# Altium PCB PDC.PcbDoc (part 3 of 3)
Units mil, origin at the board's own origin, x right, y up, seen from the top; angles counter-clockwise.
Board outline 5200.04 x 5000 mil, 4 copper layers (Top Layer, Signal Layer 1, Signal Layer 2, Bottom Layer), stack 30.634 mil thick; 172 components, 174 nets, 838 pads, 390 vias.
Unrouted connection lines stored in the file: 157.
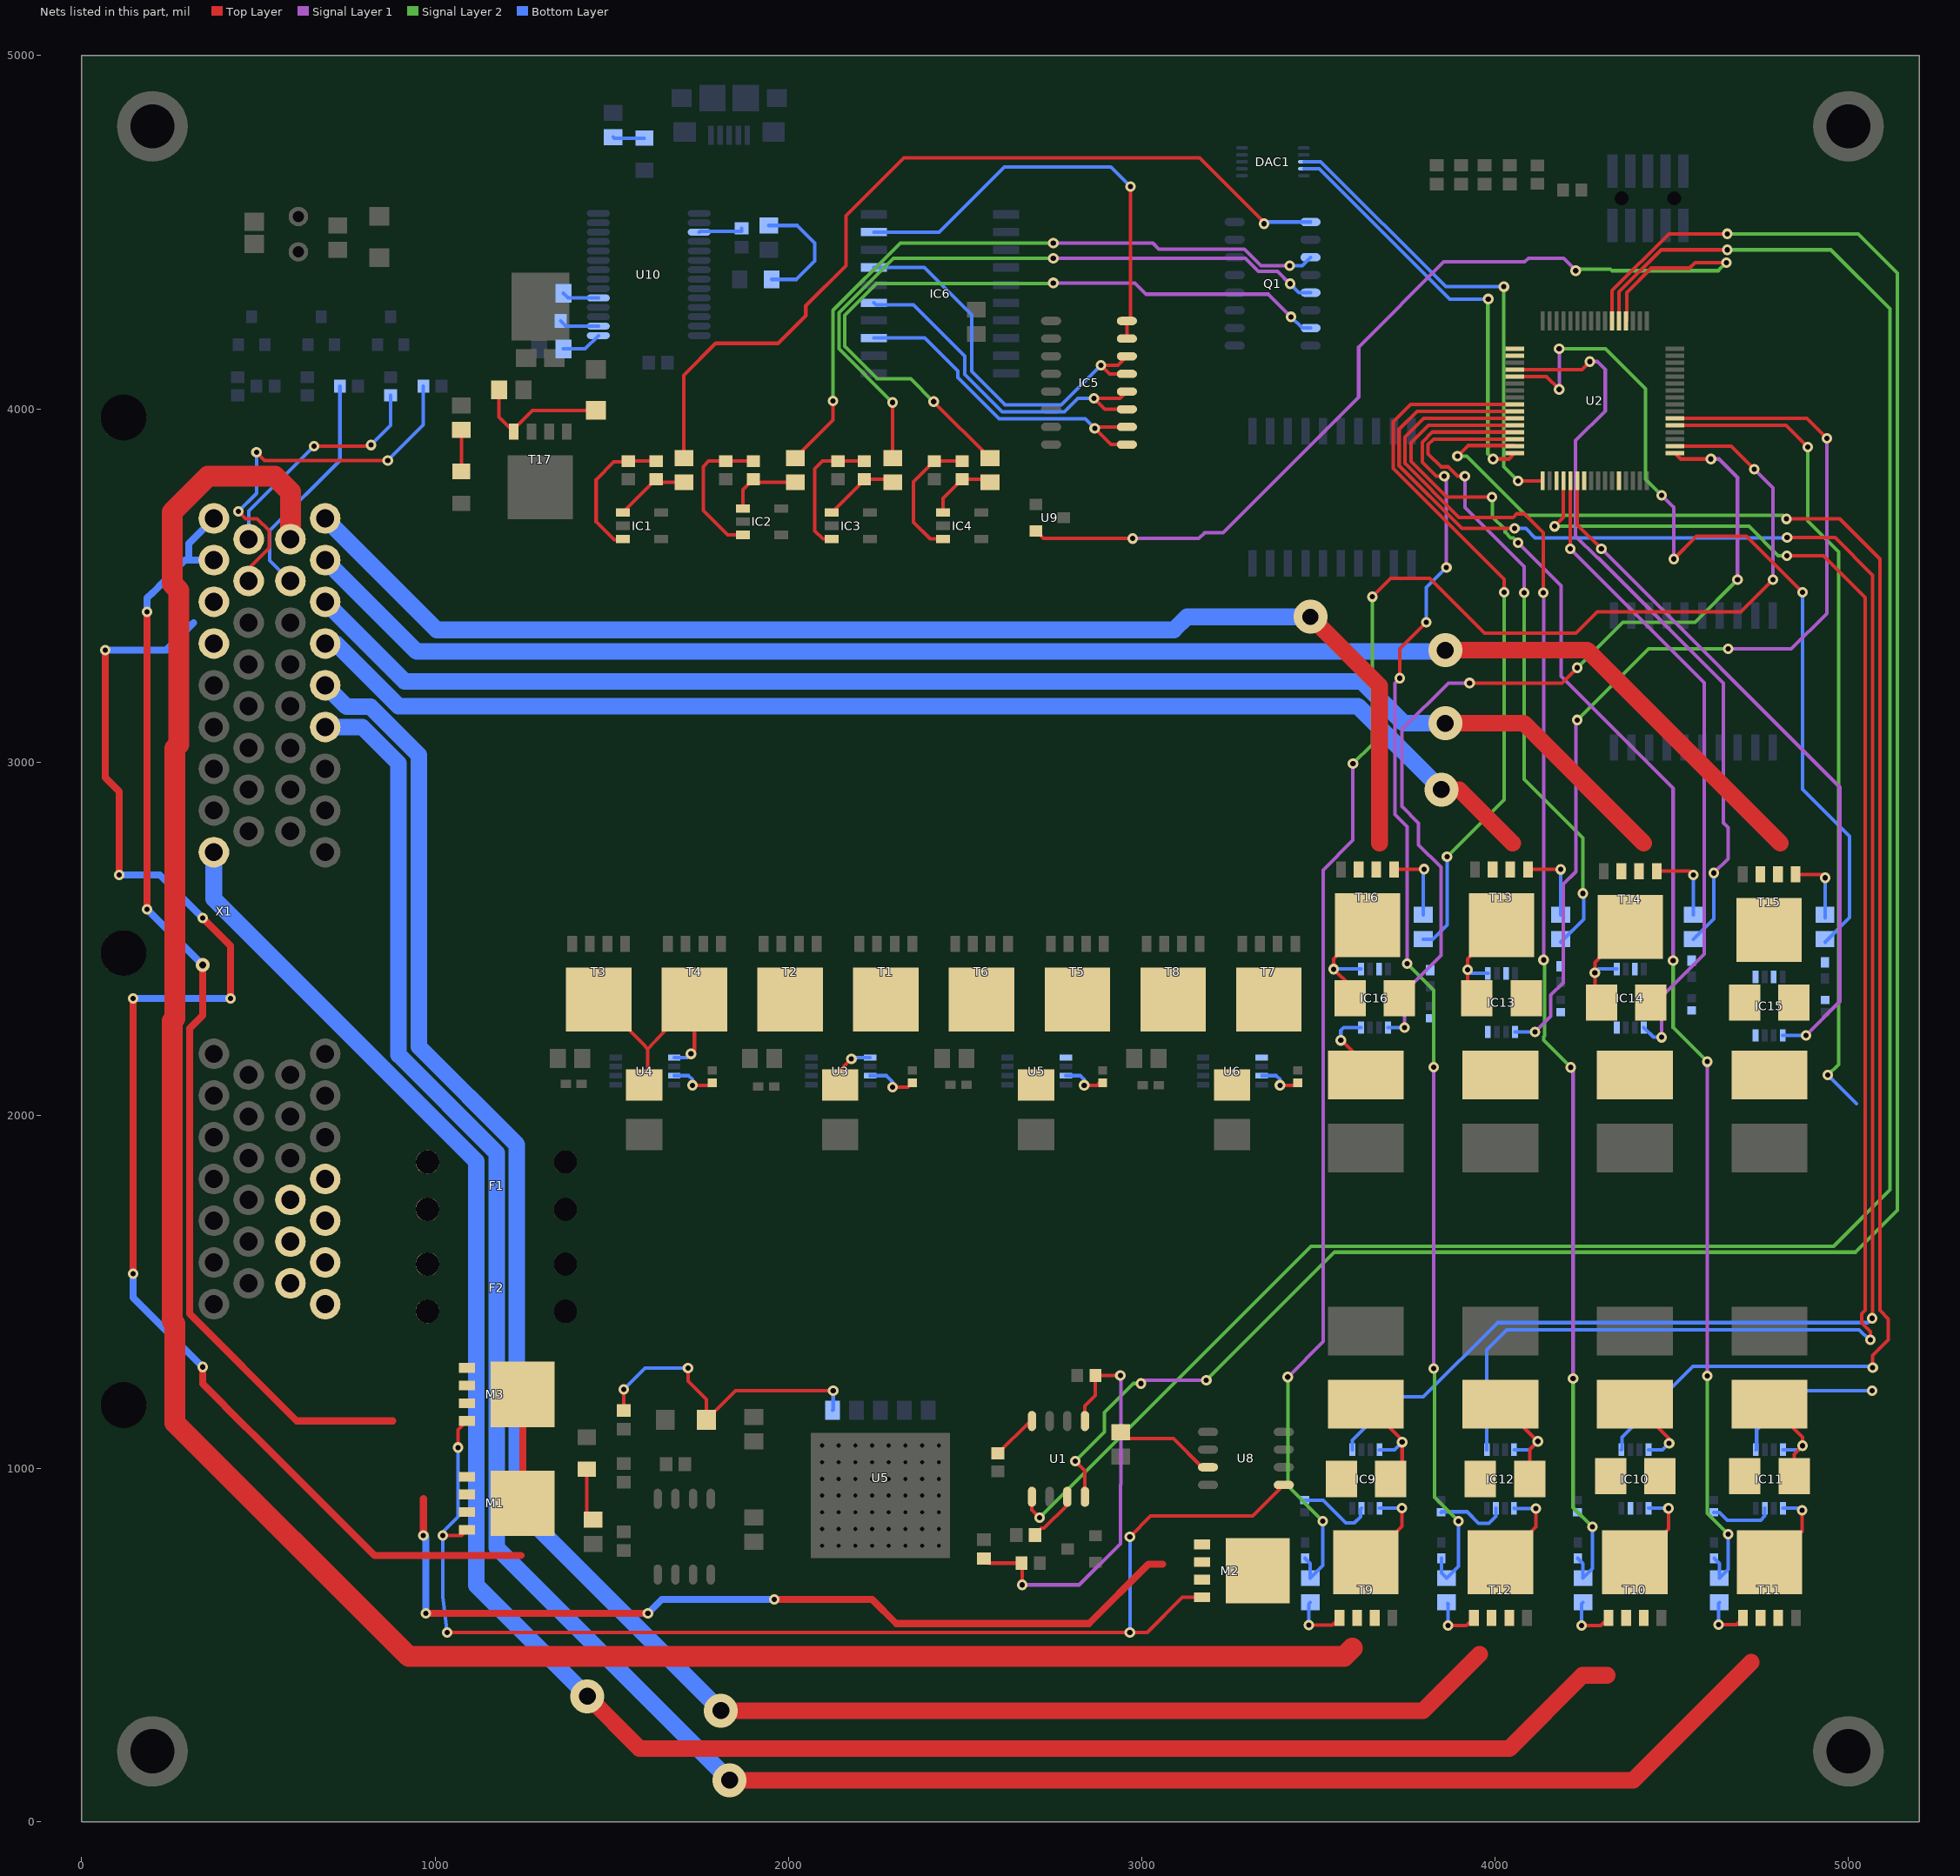
[diagram p5: the nets of this part, all layers, seen from the top]

## Via types
v1: diameter 30, hole 15, Top Layer to Bottom Layer, 376 vias
v2: diameter 96, hole 48, Top Layer to Bottom Layer, 6 vias
v3: diameter 20, hole 10, Top Layer to Bottom Layer, 3 vias
v4: diameter 100, hole 50, Top Layer to Bottom Layer, 2 vias
v5: diameter 96, hole 46, Top Layer to Bottom Layer, 1 vias
v6: diameter 35, hole 20, Top Layer to Bottom Layer, 1 vias
v7: diameter 40, hole 20, Top Layer to Bottom Layer, 1 vias

## Nets (pads, with @x,y where several pads share a name; then routed paths per layer and width w, separated by ;. In a path a pad name is that pad's centre, name@x,y a point inside that pad or via, vN(x,y) a via of type N, cw(c..) or ccw(c..) an arc to the next point about the centre after c; other vN are vias at no path point) (continued)
LC_1_ISENSE_ADC: IC16.5 U2.49 | length 2600.6
  Top Layer w10: v1(3927.57,3223.95) 4189.46,3223.95 v1(4232.68,3267.17) ; U2.49@4508.27,3874.97 4525.16,3858.08 v1(4610.61,3858.08)
  Signal Layer 1 w10: v1(3743.9,2248.51) 3743.9,2349.76 3847.03,2452.89 3847.03,2702.54 3783.45,2766.13 3783.45,2827.62 3736.49,2874.59 3736.49,3092.92 3867.51,3223.95 v1(3927.57,3223.95) ; v1(4610.61,3858.08) 4633.92,3858.08 4685.93,3806.07 v1(4685.93,3516.24)
  Signal Layer 2 w10: v1(4232.68,3267.17) 4361.58,3396.06 4565.76,3396.06 v1(4685.93,3516.24)
  Bottom Layer w10: IC16.5@3697.03,2248.51 v1(3743.9,2248.51)
LC_1_OUTPUT: R59.2 T16.1 T16.2 T16.3 X1.A1 | length 3872.4
  Top Layer w10: T16.1@3713.96,2696.16 3714.92,2697.11 v1(3799.01,2697.11)
  Top Layer w47.24: v5(3477.48,3411.42) 3672.82,3216.07 3672.82,2770.63
  Bottom Layer w10: R59.2@3796.44,2567.62 3796.44,2694.55 v1(3799.01,2697.11)
  Bottom Layer w47.24: X1.A1@688.98,3690.01 1004.81,3374.17 3090.86,3374.17 3128.11,3411.42 v5(3477.48,3411.42)
LC_1_VSENSE_ADC: R59.1 R60.2 U2.25 | length 2069.8
  Top Layer w10: v1(4025.67,3480.83) 4025.67,3518.21 3711.73,3832.15 3711.73,3963.53 3760.97,4012.77 U2.25@4055.51,4012.77
  Signal Layer 2 w10: v1(3863.78,2732.15) 4025.67,2894.04 v1(4025.67,3480.83)
  Bottom Layer w10: R59.1@3796.44,2498.72 3823.42,2498.72 3863.78,2539.08 v1(3863.78,2732.15)
LC_2_ISENSE_ADC: IC15.5 U2.38 | length 1982.5
  Top Layer w10: U2.38@4232.68,3796.23 4232.68,3672.12 v1(4300.71,3604.09)
  Signal Layer 1 w10: v1(4300.71,3604.09) 4975.2,2929.6 4975.2,2322.14 v1(4879.51,2226.46)
  Bottom Layer w10: IC15.5@4813.96,2226.46 v1(4879.51,2226.46)
LC_2_OUTPUT: R56.2 T15.1 T15.2 T15.3 X1.A2 | length 4653.5
  Top Layer w10: T15.1@4850.58,2682.38 4923.81,2682.38 v1(4933.65,2672.54)
  Top Layer w47.24: v2(3858.8,3316.93) 4260.78,3316.93 4807.07,2770.63
  Bottom Layer w10: R56.2@4933.65,2559.35 v1(4933.65,2672.54)
  Bottom Layer w47.24: X1.A2@688.98,3571.9 947.77,3313.11 3854.98,3313.11 v2(3858.8,3316.93)
LC_2_VSENSE_ADC: R56.1 R57.2 U2.21 | length 2593.7
  Top Layer w10: U2.21@4055.51,4091.51 4144.94,4091.51 v1(4181.33,4055.12) ; v1(4505.22,3574.96) 4569.74,3639.49 4711.38,3639.49 v1(4870.04,3480.83)
  Signal Layer 1 w10: v1(4181.33,4055.12) v1(4181.33,4170.25) ; v1(4470.98,3755.63) 4505.22,3721.4 v1(4505.22,3574.96)
  Signal Layer 2 w10: v1(4181.33,4170.25) 4312.59,4170.25 4425.72,4057.11 4425.72,3800.89 v1(4470.98,3755.63)
  Bottom Layer w10: v1(4870.04,3480.83) 4870.04,2923.16 5002.93,2790.27 5002.93,2559.73 R56.1@4933.65,2490.45
LC_3_ISENSE_ADC: IC14.5 U2.37 | length 1843.8
  Top Layer w10: v1(4212.6,3604.09) 4212.6,3795.84 U2.37@4212.99,3796.23
  Signal Layer 1 w10: v1(4212.6,3604.09) 4591.53,3225.16 4591.53,2456.39 4470.98,2335.84 v1(4470.98,2221)
  Bottom Layer w10: IC14.5@4420.85,2248.51 4448.36,2221 v1(4470.98,2221)
LC_3_OUTPUT: R53.2 T14.1 T14.2 T14.3 X1.A3 | length 4235.3
  Top Layer w10: T14.1@4457.47,2691.24 4549.79,2691.24 v1(4560.62,2680.41)
  Top Layer w47.24: v2(3858.8,3110.24) 4081.25,3110.24 4420.85,2770.63
  Bottom Layer w10: R53.2@4560.62,2567.62 v1(4560.62,2680.41)
  Bottom Layer w47.24: X1.A3@688.98,3453.79 914.42,3228.35 3622.92,3228.35 3741.03,3110.24 v2(3858.8,3110.24)
LC_3_VSENSE_ADC: R53.1 R54.2 U2.20 | length 2142.9
  Top Layer w10: U2.20@4055.51,4111.19 4245.46,4111.19 v1(4268.12,4133.86)
  Signal Layer 1 w10: v1(4268.12,4133.86) 4288.75,4133.86 4311.73,4110.88 4311.73,3993.79 4227.83,3909.89 4227.83,3639.49 4289.73,3577.59 4292.03,3577.59 4645.67,3223.95 4645.67,2827.81 4659.18,2814.3 4659.18,2726.73 v1(4618.69,2686.24)
  Bottom Layer w10: R53.1@4560.62,2498.72 4618.69,2556.79 v1(4618.69,2686.24)
LC_4_ISENSE_ADC: IC13.5 U2.54 | length 2769.5
  Top Layer w10: U2.54@4508.27,3973.4 4881.73,3973.4 v1(4938.6,3916.53)
  Signal Layer 1 w10: v1(4113.06,2236.3) 4157.54,2280.78 4157.54,2340.51 4192.53,2375.5 4192.53,2654.32 4228.07,2689.86 4228.07,3114.75 v1(4232.68,3119.35) ; v1(4659.41,3320.76) 4838.32,3320.76 4938.6,3421.05 v1(4938.6,3916.53)
  Signal Layer 2 w10: v1(4232.68,3119.35) 4434.09,3320.76 v1(4659.41,3320.76)
  Bottom Layer w10: IC13.5@4056.42,2236.3 v1(4113.06,2236.3)
LC_4_OUTPUT: R50.2 T13.1 T13.2 T13.3 X1.A4 | length 3816.7
  Top Layer w10: T13.1@4093.03,2696.16 4093.11,2696.24 v1(4185.62,2696.24)
  Top Layer w47.24: v2(3848.02,2922.29) 3897.87,2922.29 4049.53,2770.63
  Bottom Layer w10: R50.2@4185.62,2567.62 v1(4185.62,2696.24) v1@4185.62,2697.11
  Bottom Layer w47.24: X1.A4@688.98,3335.68 719.47,3335.68 896.64,3158.51 3611.8,3158.51 v2(3848.02,2922.29)
LC_4_VSENSE_ADC: R50.1 R51.2 U2.30 | length 1892.6
  Top Layer w10: v1(3914.29,3809.45) 3893.6,3809.45 3867.1,3835.96 3847.04,3835.96 3810.6,3872.4 3810.6,3898.88 3826.06,3914.34 U2.30@4055.51,3914.34
  Signal Layer 1 w10: v1(3914.29,3809.45) 3914.29,3721.17 4082.21,3553.25 v1(4082.21,3479.35)
  Signal Layer 2 w10: v1(4082.21,3479.35) 4082.21,2951.74 4248.64,2785.32 v1(4248.64,2628.28)
  Bottom Layer w10: R50.1@4185.62,2490.45 4250.36,2555.19 4250.36,2626.56 v1(4248.64,2628.28)
LC_5_ISENSE_ADC: IC12.5 U2.36 | length 4621.9
  Top Layer w10: v1(4168.12,3667.47) 4193.31,3692.65 U2.36@4193.31,3796.23 ; v1(4825.47,3584.26) 4928.74,3584.26 5047.52,3465.47 5047.52,1448.65 5036.89,1438.02 5036.89,1413.16 5062.15,1387.91 v1(5062.15,1364.51)
  Signal Layer 2 w10: v1(4168.12,3667.47) 4718.07,3667.47 4801.28,3584.26 v1(4825.47,3584.26)
  Bottom Layer w10: IC12.5@3976.63,1053.66 3976.63,1336.54 4033.4,1393.31 5030.35,1393.31 5059.16,1364.51 v1(5062.15,1364.51)
LC_5_OUTPUT: R47.2 T12.1 T12.2 T12.3 X1.A5 | length 5764.7
  Top Layer w10: v1(3866.88,555.64) 3918.59,555.64 T12.1@3940.01,577.07
  Top Layer w47.24: v2(1808.94,314.96) 3795.91,314.96 3955.8,474.85
  Bottom Layer w10: R47.2@3865.93,618.21 3867.46,616.68 3866.88,616.1 v1(3866.88,555.64)
  Bottom Layer w47.24: X1.A5@688.98,3217.57 749.84,3156.7 817.5,3156.7 953.88,3020.31 953.88,2195.24 1231.42,1917.7 1231.42,892.48 v2(1808.94,314.96)
LC_5_VSENSE_ADC: R47.1 R48.2 U2.29 | length 3740.8
  Top Layer w10: v1(3730.11,3237.78) 3730.11,3320.76 v1(3805.41,3396.06) ; v1(3856.12,3809.46) 3833.9,3809.46 3794.1,3849.25 3794.1,3905.72 3822.85,3934.47 4055.07,3934.47 U2.29@4055.51,3934.03
  Signal Layer 1 w10: v1(3730.11,3237.78) 3716.28,3223.95 3716.28,2852.05 3751.36,2816.96 v1(3751.36,2429.17) ; v1(3825.97,2136.64) 3826.36,2136.25 v1(3826.36,1283.86) ; v1(3856.12,3809.46) 3862.27,3803.31 v1(3862.27,3551.28)
  Signal Layer 2 w10: v1(3751.36,2429.17) 3825.97,2354.56 v1(3825.97,2136.64) ; v1(3826.36,1283.86) 3828.02,1282.21 3828.02,919.24 v1(3895.88,851.38)
  Bottom Layer w10: v1(3805.41,3396.06) 3805.41,3494.42 v1(3862.27,3551.28) ; R48.2@3848.02,746.16 3848.02,705.02 R47.1@3862.78,690.26 3895.88,723.35 v1(3895.88,851.38)
LC_6_ISENSE_ADC: IC11.5 U2.53 | length 2773.1
  Top Layer w10: U2.53@4508.27,3953.71 4822.85,3953.71 v1(4884.35,3892.21)
  Signal Layer 2 w10: v1(4884.35,3892.21) 4884.35,3683.12 4971.78,3595.7 4971.78,2144.44 v1(4941.41,2114.07)
  Bottom Layer w10: IC11.5@4737.78,1053.66 4740.1,1055.98 4740.1,1109.41 4851.17,1220.47 v1(5066.9,1220.47) ; v1(4941.41,2114.07) 5022.79,2032.69
LC_6_OUTPUT: R44.2 T11.1 T11.2 T11.3 X1.A6 | length 6686.6
  Top Layer w10: v1(4632.64,558.67) 4682.77,558.67 T11.1@4701.17,577.07
  Top Layer w47.24: v2(1833.15,118.11) 4391.02,118.11 4724.95,452.04
  Bottom Layer w10: v1(4632.64,558.67) 4632.64,619.1 4634.67,621.12 R44.2@4634.44,621.36
  Bottom Layer w47.24: X1.A6@688.98,3099.46 793.78,3099.46 896.64,2996.6 896.64,2171.53 1174.18,1893.99 1174.18,777.09 v2(1833.15,118.11)
LC_6_VSENSE_ADC: R44.1 R45.2 U2.28 | length 4050.6
  Top Layer w10: v1(3991.23,3750.46) 3863.42,3750.46 3762.34,3851.54 3762.34,3904.28 3811.78,3953.71 U2.28@4055.51,3953.71
  Signal Layer 1 w10: v1(4064.78,3621.35) 4186.86,3499.27 4186.86,3242.8 4503.78,2925.89 v1(4503.78,2437.79) ; v1(4600.72,1262.84) v1(4600.72,2152.07)
  Signal Layer 2 w10: v1(3991.23,3750.46) 3992.21,3749.48 3992.21,3693.92 4028.62,3657.51 4028.62,3650.44 4044.14,3634.92 4051.21,3634.92 v1(4064.78,3621.35) ; v1(4503.78,2437.79) 4503.78,2249.01 v1(4600.72,2152.07) ; v1(4600.72,1262.84) 4600.72,873.1 v1(4659.41,814.41)
  Bottom Layer w10: R45.2@4619.67,746.16 4634.44,731.4 R44.1@4634.44,690.26 4659.41,715.23 v1(4659.41,814.41)
LC_7_ISENSE_ADC: IC10.5 U2.31 | length 4637.7
  Top Layer w10: v1(3893.31,3866.42) 3923.06,3896.17 4054,3896.17 U2.31@4055.51,3894.66 ; v1(4824.68,3688.38) 4975.2,3688.38 5088.61,3574.96 5088.61,1447.97 5112.37,1424.21 5112.37,1364.51 5068.61,1320.75 v1(5068.61,1286.02)
  Signal Layer 2 w10: v1(3893.31,3866.42) 3919.33,3866.42 4075.83,3709.92 4087.46,3698.29 4814.77,3698.29 v1(4824.68,3688.38)
  Bottom Layer w10: IC10.5@4357.2,1053.66 4359.53,1055.99 4359.53,1088.82 4560.04,1289.34 5065.29,1289.34 v1(5068.61,1286.02)
LC_7_OUTPUT: R41.2 T10.1 T10.2 T10.3 X1.A34 | length 6012.1
  Top Layer w10: v1(4244.67,555.64) 4299.17,555.64 T10.1@4320.59,577.07
  Top Layer w47.24: v2(1431.06,355.73) 1578.99,207.81 4040.08,207.81 4247.24,414.96 4316.74,414.96
  Bottom Layer w10: v1(4244.67,555.64) 4244.67,617.42 R41.2@4248.61,621.36
  Bottom Layer w47.24: X1.A34@374.02,2745.13 374.02,2613.19 1116.94,1870.28 1116.94,669.86 v2(1431.06,355.73)
LC_7_VSENSE_ADC: R41.1 R42.2 U2.27 | length 3980.6
  Top Layer w10: U2.27@4055.51,3973.4 3797.51,3973.4 3744.73,3920.62 3744.73,3845.82 3897.52,3693.03 4050.76,3693.03 4060.76,3703.03 4082.72,3703.03 4136.14,3649.6 v1(4136.14,3479.35)
  Signal Layer 1 w10: v1(4136.14,3479.35) 4137.09,3478.4 v1(4137.09,2439.89) ; v1(4213.52,2136) 4220.59,2128.93 v1(4220.59,1255.44)
  Signal Layer 2 w10: v1(4137.09,2439.89) 4139.56,2437.42 4139.56,2225.32 4137.09,2222.85 4137.09,2212.43 v1(4213.52,2136) ; v1(4220.59,1255.44) 4220.59,890.17 v1(4275.39,835.37)
  Bottom Layer w10: R42.2@4233.84,746.16 4248.61,731.4 R41.1@4248.61,690.26 4275.39,717.04 v1(4275.39,835.37)
LC_8_ISENSE_ADC: IC9.5 U2.26 | length 5666.6
  Top Layer w10: v1(4055.12,3661.42) 3905.79,3661.42 3728.23,3838.99 3728.23,3941.85 3779.46,3993.08 U2.26@4055.51,3993.08 ; v1@4825.47,3635.92 v1(4826.27,3635.92) 4961.72,3635.92 5068.61,3529.03 5068.61,1427.31 v1(5066.89,1425.59)
  Bottom Layer w10: IC9.5@3596.05,1053.66 3596.05,1080.58 3718.73,1203.26 3796.44,1203.26 4006.5,1413.31 5054.62,1413.31 v1(5066.89,1425.59) ; v1(4055.12,3661.42) 4086.85,3661.42 4113.35,3634.92 4825.27,3634.92 v1(4826.27,3635.92)
LC_8_OUTPUT: R38.2 T9.1 T9.2 T9.3 X1.A10 | length 6921.4
  Top Layer w9.84: T9.2@3609.44,568.06 T9.2@3609.44,577.07 ; T9.3@3659.44,568.06 T9.3@3659.44,577.07
  Top Layer w10: v1(3472.48,557.1) 3539.47,557.1 T9.1@3559.44,577.07
  Top Layer w59.06: X1.A10@590.55,3630.95 590.55,3765.41 546.23,3809.72 357.75,3809.72 255.91,3707.88 255.91,3504.91 274.53,3486.29 274.53,3049.8 263.74,3039.01 263.74,2274.77 255.94,2266.96 255.94,1417.81 263.74,1410 263.74,1130.04 925.32,468.46 3572.86,468.46 3596.05,491.65
  Bottom Layer w10: v1(3472.48,557.1) 3472.48,616.89 R38.2@3476.96,621.36
LC_8_VSENSE_ADC: R38.1 R39.2 U2.50 | length 4863.7
  Top Layer w10: v1(3652.3,3468.06) 3704.19,3519.95 3815.09,3519.95 3970.44,3364.6 4228.07,3364.6 4288.67,3425.2 4694.89,3425.2 v1(4785.93,3516.24) ; U2.50@4508.27,3894.66 4667.62,3894.66 v1(4733.04,3829.23)
  Signal Layer 1 w10: v1(3413.2,1259.43) 3513.2,1359.43 3513.2,2694.19 3597.63,2778.62 v1(3597.63,2995.64) ; v1(4733.04,3829.23) 4785.93,3776.34 v1(4785.93,3516.24)
  Signal Layer 2 w10: v1(3413.2,1259.43) 3413.2,950.57 v1(3512.39,851.38) ; v1(3597.63,2995.64) 3652.3,3050.32 v1(3652.3,3468.06)
  Bottom Layer w10: R39.2@3462.19,746.16 3476.96,731.4 R38.1@3476.96,690.26 3512.39,725.69 v1(3512.39,851.38)
MOSI: DAC1.8 U2.33 | length 1348.1
  Top Layer w10: v1(4064.58,3796.23) U2.33@4134.25,3796.23
  Signal Layer 2 w10: v1(4024.74,4345.7) 4024.74,3836.07 v1(4064.58,3796.23)
  Bottom Layer w10: DAC1.8@3458.78,4699.39 3506.42,4699.39 3860.1,4345.7 v1(4024.74,4345.7)
NetC2_2: C2.2 R13.2 R14.1 U1.5 | length 1191.6
  Top Layer w10: C2.2@2553.56,745.49 2566.35,732.7 R14.1@2659.86,732.7 2663.93,728.63 2661.83,726.53 v1(2661.83,671.07) ; U1.5@2839.19,1134.93 2839.19,1177.96 2868.52,1207.29 R13.2@2868.52,1263.86 v1(2939.36,1263.86)
  Signal Layer 1 w10: v1(2661.83,671.07) 2823.09,671.07 2939.36,787.34 2939.36,954.04 2941.38,956.06 2941.38,1261.84 v1(2939.36,1263.86)
NetC7_2: C7.2 U3.3 | length 147
  Top Layer w10: v1(2294.88,2079.77) 2338.32,2079.77 C7.2@2350.76,2092.21
  Bottom Layer w10: U3.3@2231.12,2112.5 2276.98,2112.5 2294.88,2094.6 v1(2294.88,2079.77)
NetC8_2: C8.2 U4.3 | length 131.1
  Top Layer w10: v1(1728.71,2085.3) 1777.51,2085.3 C8.2@1784.43,2092.22
  Bottom Layer w10: U4.3@1677,2112.5 1717.73,2112.5 1728.71,2101.53 v1(1728.71,2085.3)
NetC9_2: C9.2 U5.3@2785.25,2112.5 | length 118.1
  Top Layer w10: v1(2836.96,2085.3) 2872.76,2085.3 C9.2@2879.68,2092.21
  Bottom Layer w10: U5.3@2785.25,2112.5 2825.98,2112.5 2836.96,2101.53 v1(2836.96,2085.3)
NetC10_2: C10.2 U6.3 | length 125.9
  Top Layer w10: v1(3391.08,2085.3) 3434.7,2085.3 C10.2@3441.61,2092.21
  Bottom Layer w10: U6.3@3339.37,2112.5 3380.11,2112.5 3391.08,2101.53 v1(3391.08,2085.3)
NetC11_2: C11.2 IC9.3 | length 217
  Bottom Layer w10: C11.2@3461.21,910.92 3512.95,910.92 3577.6,846.27 3601.43,846.27 3619.32,864.16 3619.32,885.55 IC9.3@3621.64,887.88
NetC12_2: C12.2 IC10.3
NetC13_2: C13.2 IC11.3 | length 181
  Bottom Layer w10: C13.2@4618.69,876.28 4635.01,876.28 4657.42,853.88 4751.42,853.88 4763.37,865.83 IC11.3@4763.37,887.88
NetC14_2: C14.2 IC12.3 | length 200.9
  Bottom Layer w10: C14.2@3847.03,876.28 3848.63,877.88 3920.4,877.88 3953.42,844.86 3982.34,844.86 4002.22,864.74 IC12.3@4002.22,887.88
NetC15_2: C15.2 IC13.3
NetC16_2: C16.2 IC14.3
NetC17_2: C17.2 IC15.3
NetC18_2: C18.2 IC16.3
NetC20_2: C20.2 D5.2 U5.1@2124.94,1164.95 | length 883.4
  Top Layer w10: C20.2@1534,1164.76 v1(1534,1224.04) ; v1(1715.7,1284.61) 1715.7,1247.83 1767.86,1195.66 D5.2@1767.86,1138.18 1850.26,1220.58 2017.36,1220.58 2017.43,1220.5 v1(2126.72,1220.47)
  Bottom Layer w10: v1(1534,1224.04) 1594.58,1284.61 v1(1715.7,1284.61) ; U5.1@2124.94,1164.95 2126.72,1166.74 v1(2126.72,1220.47)
NetC24_1: C24.1 U10.2 | length 112.6
  Bottom Layer w10: C24.1@1355.44,4248.4 1369.73,4234.11 U10.2@1462.09,4234.11
NetD7_1: D7.1 R66.2 T17.4 | length 398.2
  Top Layer w10: R66.2@1180.91,4053.94 1180.91,3977.13 T17.4@1222.84,3935.2 1222.84,3942.83 1275.88,3995.87 D7.1@1455.32,3995.87
NetD9_1: D9.1 R70.1 | length 345.7
  Bottom Layer w10: R70.1@1944.57,4519.07 2025.18,4519.07 2074.77,4469.48 2074.77,4418.28 2022.99,4366.51 D9.1@1952.45,4366.51
NetD10_1: D10.1 R71.1 | length 89.5
  Bottom Layer w10: R71.1@1504.06,4769.28 1507.23,4766.11 D10.1@1592.21,4766.11
NetF1_2: F1.2 F2.2 X1.B4 X1.B5 X1.B6 X1.B7 X1.B11 X1.B12 X1.B13
NetIC1_1: IC1.1 R1.2 R2.1 | length 215.6
  Top Layer w10: IC1.1@1532.09,3706.47 1532.09,3707.45 R1.2@1625.59,3800.96 1634.45,3792.1 R2.1@1704.33,3792.1
NetIC1_3: IC1.3 R1.1 R3.2 | length 406.9
  Top Layer w10: IC1.3@1532.09,3629.44 1507.15,3629.44 1455.89,3680.7 1455.89,3799.62 1506.19,3849.92 R3.2@1546.85,3849.92 ; R3.2@1546.85,3852.14 R1.1@1625.59,3852.14
NetIC2_1: IC2.1 R4.2 R5.1 | length 217.1
  Top Layer w10: IC2.1@1870.98,3718.1 1870.98,3770.76 R4.2@1901.18,3800.96 1910.04,3792.1 R5.1@2019.29,3792.1
NetIC2_3: IC2.3 R4.1 R6.2 | length 413.4
  Top Layer w10: IC2.3@1870.98,3643.3 1828.21,3643.3 1758.96,3712.55 1758.96,3836.58 1774.52,3852.14 R6.2@1822.44,3852.14 R4.1@1901.18,3852.14
NetIC3_1: IC3.1 R7.2 R8.1 | length 216.3
  Top Layer w10: IC3.1@2122.64,3706.47 2214.98,3798.8 R7.2@2214.98,3800.96 2286.03,3800.96 R8.1@2294.89,3792.1
NetIC3_3: IC3.3 R7.1 R9.2 | length 382.2
  Top Layer w10: IC3.3@2122.64,3631.66 2097.7,3631.66 2074.77,3654.59 2074.77,3830.16 2096.74,3852.14 R9.2@2140.36,3852.14 R7.1@2214.98,3852.14
NetIC4_1: IC4.1 R10.2 R11.1 | length 199.3
  Top Layer w10: IC4.1@2437.6,3706.47 2437.6,3746.82 R10.2@2491.73,3800.96 2561.62,3800.96 R11.1@2570.47,3792.1
NetIC4_3: IC4.3 R10.1 R12.2 | length 380
  Top Layer w10: IC4.3@2437.6,3631.66 2401.23,3631.66 2353.88,3679.02 2353.88,3793.54 2412.48,3852.14 R12.2@2413,3852.14 R10.1@2491.73,3852.14
NetIC5_1: IC5.1 IC5.2 IC6.3 | length 944.6
  Top Layer w10: IC5.1@2957.94,3898.88 2912.84,3898.88 v1(2866.65,3945.08) 2870.46,3948.88 IC5.2@2957.94,3948.88
  Bottom Layer w10: IC6.3@2241.94,4200.43 2385.96,4200.43 2478.89,4107.51 2478.89,4089.04 2596.41,3971.51 2840.22,3971.51 v1(2866.65,3945.08)
NetIC5_3: IC5.3 IC5.4 IC6.5 | length 1003.9
  Top Layer w10: IC5.3@2957.94,3998.88 2895.71,3998.88 v1(2864.94,4029.65) 2938.7,4029.65 IC5.4@2957.94,4048.88
  Bottom Layer w10: IC6.5@2241.94,4300.43 2248.43,4293.94 2354.15,4293.94 2498.89,4149.2 2498.89,4097.32 2604.7,3991.51 2780.87,3991.51 2819.01,4029.65 v1(2864.94,4029.65)
NetIC5_5: IC5.5 IC5.6 IC6.7 | length 1111.8
  Top Layer w10: IC5.5@2957.94,4098.88 2909.14,4098.88 v1(2884.55,4123.47) 2932.52,4123.47 IC5.6@2957.94,4148.88
  Bottom Layer w10: IC6.7@2241.94,4400.43 2384.85,4400.43 2518.89,4266.4 2518.89,4105.61 2612.98,4011.51 2772.59,4011.51 v1(2884.55,4123.47)
NetIC5_7: IC5.7 IC5.8 IC6.9 | length 1260.3
  Top Layer w10: IC5.7@2957.94,4198.88 IC5.8@2957.94,4248.88 2968.24,4259.19 v1(2968.24,4628.91)
  Bottom Layer w10: IC6.9@2241.94,4500.43 2426.31,4500.43 2610.92,4685.04 2912.11,4685.04 v1(2968.24,4628.91)
NetIC9_1: IC9.1 R37.1 T9.mb | length 260.2
  Top Layer w10: T9.mb@3634.44,734.55 3736.49,836.6 v1(3736.49,888.56)
  Bottom Layer w10: IC9.1@3672.82,887.88 3735.8,887.88 v1(3736.49,888.56)
NetIC9_8: "PTC Fuse1.1" IC9.8 R37.2 | length 340.4
  Top Layer w10: 3634.44,1182.38 3736.87,1079.94 v1(3736.87,1075.03) 3736.87,1003.32 R37.2@3704.32,970.77
  Bottom Layer w10: IC9.8@3672.82,1053.66 3715.5,1053.66 v1(3736.87,1075.03)
NetIC10_1: IC10.1 R40.1 T10.mb | length 248.8
  Top Layer w10: T10.mb@4395.59,734.55 4490.32,829.28 v1(4490.32,887.64)
  Bottom Layer w10: IC10.1@4433.98,887.88 4490.08,887.88 v1(4490.32,887.64)
NetIC10_8: "PTC Fuse2.1" IC10.8 R40.2 | length 216.6
  Top Layer w10: 4395.59,1182.38 4492.49,1085.48 v1(4492.49,1072.07)
  Bottom Layer w10: IC10.8@4433.98,1053.66 4474.09,1053.66 v1(4492.49,1072.07)
NetIC11_1: IC11.1 R43.1 T11.mb | length 247.2
  Top Layer w10: T11.mb@4776.17,729.63 4868.55,822.01 v1(4868.55,882.22)
  Bottom Layer w10: IC11.1@4814.55,887.88 4862.89,887.88 v1(4868.55,882.22)
NetIC11_8: "PTC Fuse3.1" IC11.8 R43.2 | length 312.5
  Top Layer w10: 4776.17,1182.38 4870.04,1088.51 v1(4870.04,1065.09) 4846.05,1041.1 R43.2@4846.05,978.95
  Bottom Layer w10: IC11.8@4814.55,1053.66 4858.61,1053.66 v1(4870.04,1065.09)
NetIC12_1: IC12.1 R46.1 T12.mb | length 256.5
  Top Layer w10: T12.mb@4015.01,734.55 4115.42,834.95 v1(4115.42,887.07)
  Bottom Layer w10: IC12.1@4053.4,887.88 4054.2,887.07 v1(4115.42,887.07)
NetIC12_8: "PTC Fuse4.1" IC12.8 R46.2 | length 342.6
  Top Layer w10: 4015.01,1182.38 4015.74,1182.38 v1(4120.9,1077.23) 4098.02,1054.35 R46.2@4098.02,970.77
  Bottom Layer w10: IC12.8@4053.4,1053.66 4097.33,1053.66 v1(4120.9,1077.23)
NetIC13_1: IC13.1 R49.1 T13.mb | length 320.2
  Top Layer w10: R49.1@3948.15,2331.4 3921.86,2357.69 v1(3921.86,2412.67) 3921.86,2442.51 T13.mb@4018.03,2538.68
  Bottom Layer w10: v1(3921.86,2412.67) 3932.44,2402.09 IC13.1@3979.65,2402.09
NetIC13_8: "PTC Fuse5.1" IC13.8 R49.2
NetIC14_1: IC14.1 R52.1 T14.mb | length 330
  Top Layer w10: R52.1@4300.71,2319.19 4282.25,2337.65 v1(4282.25,2403.5) 4282.25,2433.54 T14.mb@4382.47,2533.76
  Bottom Layer w10: v1(4282.25,2403.5) 4293.04,2414.29 IC14.1@4344.08,2414.29
NetIC14_8: "PTC Fuse6.1" IC14.8 R52.2
NetIC15_1: IC15.1 R55.1 T15.mb
NetIC15_8: "PTC Fuse7.1" IC15.8 R55.2
NetIC16_1: IC16.1 R58.1 T16.mb | length 343.3
  Top Layer w10: R58.1@3589.55,2331.4 3589.55,2367.62 v1(3543.22,2413.96) 3543.22,2442.94 T16.mb@3638.96,2538.68
  Bottom Layer w10: v1(3543.22,2413.96) 3543.55,2414.29 IC16.1@3620.26,2414.29
NetIC16_8: "PTC Fuse8.1" IC16.8 R58.2 | length 216.9
  Top Layer w10: v1(3563.2,2212.43) 3564.87,2212.43 3634.44,2142.86 3634.44,2114.07
  Bottom Layer w10: v1(3563.2,2212.43) 3563.2,2239.88 3571.82,2248.51 IC16.8@3620.26,2248.51
NetLED1_1: LED1.1 R63.2 | length 149.9
  Top Layer w10: LED1.1@1429.67,998.42 1429.67,873.02 R63.2@1446.99,855.7
NetLED2_2: LED2.2 R67.2 | length 117.1
  Top Layer w10: LED2.2@1074.41,3822.99 R67.2@1074.41,3940.12
NetM1_4: M1.4 M2.4 M3.4 U8.5 | length 3652.3
  Top Layer w10: v1(1021.71,810.95) 1074.5,810.95 M1.4@1090.52,826.96 ; v1(1033.86,536.5) v1(2966.34,536.5) 3015.49,536.5 3114.71,635.73 M2.4@3170.61,635.73 ; v1(1065.07,1059.84) 1065.07,1109.68 M3.4@1090.52,1135.12 ; v1(2966.34,807.47) 3025.01,866.14 3314.08,866.14 U8.5@3401.91,953.97
  Bottom Layer w10: v1(1033.86,536.5) 1021.71,637.9 v1(1021.71,810.95) 1016.92,815.74 1065.07,863.89 v1(1065.07,1059.84) ; v1(2966.34,536.5) v1(2966.34,807.47)
NetQ1_9: Q1.9 R2.2 | length 2443.6
  Top Layer w10: R2.2@1704.33,3861 1704.33,4095.55 1794.29,4185.5 1970.98,4185.5 2049.14,4263.66 2049.14,4291.95 2162.64,4405.44 2162.64,4546.86 2326.39,4710.61 3163.81,4710.61 3346.31,4528.11 v1(3346.31,4524.01)
  Bottom Layer w10: v1(3346.31,4524.01) 3351.2,4528.91 Q1.9@3477.48,4528.91
NetQ1_11: Q1.11 R5.2 | length 1928.6
  Top Layer w10: R5.2@2019.29,3860.99 2126.35,3968.05 v1(2126.35,4022.78)
  Signal Layer 1 w10: v1(2749.64,4469.48) 3031.47,4469.48 3048.54,4452.41 3290.02,4452.41 3336.93,4405.51 v1(3418.73,4405.51)
  Signal Layer 2 w10: v1(2126.35,4022.78) 2126.35,4279.09 2316.73,4469.48 v1(2749.64,4469.48)
  Bottom Layer w10: v1(3418.73,4405.51) 3454.08,4405.51 Q1.11@3477.48,4428.91
NetQ1_13: Q1.13 R8.2 | length 1913
  Top Layer w10: R8.2@2294.89,3861 v1(2294.89,4018.06)
  Signal Layer 1 w10: v1(2749.64,4426.23) 3292.87,4426.23 3330.09,4389.01 3384.06,4389.01 3418.91,4354.16 v1(3419.81,4354.16)
  Signal Layer 2 w10: v1(2294.89,4018.06) 2142.85,4170.1 2142.85,4272.26 2296.82,4426.23 v1(2749.64,4426.23)
  Bottom Layer w10: v1(3419.81,4354.16) 3445.06,4328.91 Q1.13@3477.48,4328.91
NetQ1_15: Q1.15 R11.2 | length 2039.8
  Top Layer w10: v1(2410.99,4020.48) R11.2@2570.47,3861
  Signal Layer 1 w10: v1(2749.68,4356.46) 2980.8,4356.46 3012.71,4324.55 3358.17,4324.55 v1(3422.26,4260.47)
  Signal Layer 2 w10: v1(2410.99,4020.48) 2346.29,4085.18 2251.1,4085.18 2159.35,4176.93 2159.35,4265.42 2249.25,4355.32 2749.68,4355.32 v1(2749.68,4356.46)
  Bottom Layer w10: v1(3422.26,4260.47) 3453.82,4228.91 Q1.15@3477.48,4228.91
NetR15_2: R15.2 U1.8 | length 134.2
  Top Layer w10: R15.2@2592.93,1043.39 2684.47,1134.93 U1.8@2689.19,1134.93
NetR25_1: R25.1 T1.mb T2.mb U3.1 | length 141.5
  Top Layer w10: R25.1@2146.41,2085.93 2146.41,2127.96 v1(2178.21,2159.77)
  Bottom Layer w10: v1(2178.21,2159.77) 2182.13,2163.68 U3.1@2231.12,2163.68
NetR28_1: R28.1 T3.mb T4.mb U4.1 | length 691.8
  Top Layer w10: T3.mb@1463.06,2328.05 1591.8,2199.31 1601.35,2187.67 ; R28.1@1601.35,2095.48 1601.35,2187.67 ; v1(1724.17,2174.26) 1733.96,2184.05 T4.mb@1733.96,2328.05 1601.35,2187.67
  Bottom Layer w10: U4.1@1677,2163.68 1713.59,2163.68 v1(1724.17,2174.26)
NetR31_1: R31.1 T5.mb T6.mb U5.1@2785.25,2163.68
NetR34_1: R34.1 T7.mb T8.mb U6.1
NetR64_2: R64.2 U8.3 | length 288
  Top Layer w10: R64.2@2940.29,1102.78 2957.93,1085.15 3089.43,1085.15 3170.61,1003.97 U8.3@3187.34,1003.97
NetR68_1: R68.1 U10.1 | length 114.5
  Bottom Layer w10: R68.1@1363.31,4169.66 1424.26,4169.66 U10.1@1462.09,4207.49
NetR69_1: R69.1 U10.5 | length 104.2
  Bottom Layer w10: R69.1@1363.31,4327.14 1376.5,4313.95 U10.5@1462.09,4313.95
NetU1_1: U1.1 U2.5 | length 6320
  Top Layer w10: U1.1@2689.19,920.36 2689.19,883.26 v1@2711.04,861.41 ; U2.5@4350.79,4248.99 4350.79,4330.85 4470.1,4450.17 v1(4656.69,4450.17)
  Signal Layer 2 w10: v1(2711.04,861.27) 3479.12,1629.35 4957.95,1629.35 5117.49,1788.89 5117.49,4282.99 4950.31,4450.17 v1(4656.69,4450.17)
NetU1_4: U1.4 U2.6 | length 6423.9
  Top Layer w10: v1(2811.96,1021.65) 2839.19,994.42 U1.4@2839.19,920.36 ; U2.6@4331.1,4248.99 4331.1,4334.5 4492.15,4495.55 v1(4656.69,4495.55)
  Signal Layer 1 w10: v1(2997.41,1241.05) 3006.74,1250.38 v1(3182.72,1250.38)
  Signal Layer 2 w10: v1(2811.96,1021.65) 2893.98,1103.68 2893.98,1158.74 2976.29,1241.05 v1(2997.41,1241.05) ; v1(3182.72,1250.38) 3545.2,1612.85 5020.13,1612.85 5138.33,1731.04 5138.33,4384.42 5027.2,4495.55 v1(4656.69,4495.55)
NetU2_17: U2.17
NetU2_18: U2.18
NetU2_35: U2.35
NetU2_39: U2.39
NetU2_44: U2.44
RECTIFIER_IN: M1.mb M2.mb M3.mb X1.A28 X1.A29 | length 4340.4
  Top Layer w20: v1(66.89,3316.93) 66.89,2956.77 106.26,2917.4 v1(106.26,2680.41) ; v1(145.63,1551.64) v1(145.63,2331.4) ; v1(342.48,1287.73) 342.48,1240.01 465.97,1116.52 466.17,1116.52 498.39,1084.3 498.39,1084.1 828.2,754.28 1242.99,754.28 ; v1(342.48,2559.06) 421.22,2480.32 v1(421.22,2331.4) ; M1.mb@1248,901.96 M3.mb@1248,1210.12
  Bottom Layer w20: v1(66.89,3316.93) 239.21,3316.93 317.02,3394.73 ; v1(106.26,2680.41) 221.13,2680.41 v1(342.48,2559.06) ; v1(145.63,1551.64) 145.63,1484.58 v1(342.48,1287.73) ; v1(145.63,2331.4) v1(421.22,2331.4)
RECTIFIER_OUT: M1.1 M1.2 M1.3 M2.1 M2.2 M2.3 M3.1 M3.2 M3.3 X1.A26 X1.A27 | length 5716.3
  Top Layer w20: v1(185,2583.18) v1(185,3425.2) ; v7(342.48,2425.7) 342.48,2283.46 305.47,2246.45 305.47,1438.32 608.67,1135.12 879.9,1135.12 ; v1(967.01,810.95) 967.01,915.28 ; v1(973.53,590.55) v1(1602.33,590.55) ; v1(1960.01,629.92) 2236.71,629.92 2305.14,561.5 2850.47,561.5 3018.79,729.82 3059.51,729.82
  Bottom Layer w20: v1(185,2583.18) v7(342.48,2425.7) ; v1(185,3425.2) 185,3464.57 198.28,3477.84 199.5,3477.84 220,3498.35 220,3499.57 292.34,3571.9 303.11,3571.9 ; X1.A27@374.02,3571.9 303.11,3571.9 ; X1.A26@374.02,3690.01 303.11,3619.11 303.11,3571.9 ; v1(967.01,810.95) 973.53,804.43 v1(973.53,590.55) ; v1(1602.33,590.55) 1641.7,629.92 v1(1960.01,629.92)
Relay_Sig_HC_1: R22.2 X1.A19 | length 1098
  Top Layer w10: v1(443.39,3709.66) 463.79,3689.26 496.59,3689.26 530.75,3655.1 530.75,3606.8 472.44,3548.49 X1.A19@472.44,3512.84 ; v1(494.57,3876.82) 517.14,3854.25 865.54,3854.25 v1(866.14,3853.65)
  Bottom Layer w10: v1(443.39,3709.66) 494.57,3760.84 v1(494.57,3876.82) ; v1(866.14,3853.65) 967.01,3954.52 R22.2@967.01,4064.02
Relay_Sig_HC_2: R19.2 X1.A18 | length 667
  Top Layer w10: v1(657.44,3894.66) 816.18,3894.66 v1(819.16,3897.64)
  Bottom Layer w10: X1.A18@472.44,3630.95 473.39,3631.9 473.39,3710.61 v1(657.44,3894.66) ; v1(819.16,3897.64) 874.49,3952.97 R19.2@874.49,4038.43
Relay_Sig_LC: R21.2 X1.A11 | length 657.6
  Bottom Layer w10: X1.A11@590.55,3512.84 532.25,3571.15 532.25,3655.1 730.79,3853.65 R21.2@730.79,4064.02
SCK: DAC1.9 U2.32 | length 1202.6
  Top Layer w10: v1(3994.13,3858.08) 4038.62,3858.08 U2.32@4055.51,3874.97
  Signal Layer 2 w10: v1(3980.68,4310.88) 3979.31,4309.51 3979.31,3872.9 v1(3994.13,3858.08)
  Bottom Layer w10: DAC1.9@3458.78,4679.7 3502.77,4679.7 3871.59,4310.88 v1(3980.68,4310.88)
TEMP_SENSE: U2.4 U9.2 | length 2803.9
  Top Layer w10: U9.2@2700.31,3654.59 2721.96,3632.94 v1(2974.06,3632.94) ; U2.4@4370.47,4248.99 4372.75,4248.99 4372.75,4329.48 4441.77,4398.5 4549.73,4398.5 4565.45,4414.22 v1(4654.78,4414.22)
  Signal Layer 1 w10: v1(2974.06,3632.94) 3161.34,3632.94 3178,3649.6 3230.32,3649.6 3613.81,4033.09 3613.81,4175.3 3854.8,4416.29 4083.82,4416.29 4094.02,4426.5 4193.58,4426.5 4228.07,4392 v1(4228.07,4391.15)
  Signal Layer 2 w10: v1(4228.07,4391.15) 4232.69,4395.77 4326.38,4395.77 4331,4391.15 4631.72,4391.15 v1(4654.78,4414.22)
VCC: C1.2 U1.3 | length 150.9
  Top Layer w10: C1.2@2698.24,811.44 2698.24,813.41 2716.11,831.27 2723.47,831.27 2789.19,897 U1.3@2789.19,920.36
VCC_3V3: C26.2 U10.17 | length 130.2
  Bottom Layer w10: U10.17@1747.53,4500.25 1749.3,4502.02 1867.8,4502.02 C26.2@1867.8,4511.19
pads on no net: IC6.2 IC6.4 IC6.6 IC6.8 IC7.2 IC7.4 IC7.6 IC7.8 IC8.2 IC8.4 IC8.6 IC8.8 IC9.6 IC10.6 IC11.6 IC12.6 IC13.6 IC14.6 IC15.6 IC16.6 IC17.1 IC17.3 IC17.5 IC17.7 IC17.8 J1.4 J1.6 J1.7 J1.8 J1.9 J1.10 J1.11 P1.7 P1.9 P1.MH1 P1.MH2 U5.5@2395.8,1164.95 U5.6@2260.37,923.81 U5.hole U8.2 U8.7 U10.3 U10.6 U10.8 U10.9 U10.10 U10.11 U10.12 U10.13 U10.14 U10.24 U10.27 U10.28 X1.A12 X1.A13 X1.A14 X1.A15 X1.A16 X1.A21 X1.A22 X1.A23 X1.A30 X1.B9 X1.B10 X1.B14 X1.B15 X1.B16 X1.B20 X1.B21 X1.B22 X1.CH X1.LH X1.RH

## Polygon pours and split planes (outlines as drawn)
+12 on Top Layer "Top Layer-+12" (solid, pour order 20): 1310.3,2023.92 4953.33,2023.92 4953.33,1315.26 1310.3,1315.26
HC_1_OUTPUT on Top Layer "Top Layer-HC_1_OUTPUT" (solid, pour order 40): 2937.88,2439.27 3503.26,2439.27 3503.26,2645.65 2763.87,3512.84 1083.66,3512.84 890.73,3319.92 650.96,3040.4 635.87,3025.31 635.87,2824.71 643.58,2817 729.74,2817 729.74,2825.47 1130.31,3217.57 1145.33,3217.57 2576.66,3217.57 2676.22,3040.4 2742.57,2866.35 2837.57,2665.91 2937.88,2506.09
HC_3_OUTPUT on Top Layer "Top Layer-HC_3_OUTPUT" (solid, pour order 32): 1862.2,2437.7 1361.55,2437.7 803.94,1880.09 672.11,1880.09 636.55,1915.65 640.16,1919.25 640.16,2088.88 642.21,2090.94 666.09,2108.57 718.92,2155.23 1259.84,2696.16 1862.2,2696.16
HC_2_OUTPUT on Top Layer "Top Layer-HC_2_OUTPUT" (solid, pour order 38): 2412.99,2437.7 2414.57,2439.27 2937.88,2439.27 2937.88,2473.45 2590.62,3217.57 1132.3,3217.57 718.92,2804.18 655.89,2804.18 655.89,2817 567.21,2905.68 526.21,2864.68 526.21,2699.98 602.83,2623.36 827.29,2623.36 1190.08,2986.15 1275.76,2929.28 2163.29,2910.86 2369.47,2754.33
LC_6_OUTPUT on Top Layer "Top Layer-No Net 2" (solid, pour order 54): 4679.82,609.43 4825.49,609.43 4825.49,452.04 4750.93,377.47 4679.82,377.47 4679.82,452.04
HC_4_OUTPUT on Top Layer "Top Layer-HC_4_OUTPUT" (solid, pour order 34): 2393.87,2437.7 1915.29,2437.7 1872.46,2480.53 1872.46,2696.16 1263.37,2696.16 608.45,2041.24 472.44,2041.24 472.44,2265.37 1188.42,2981.35 1944.49,2981.35 2028.65,2981.35 2393.87,2759.4
NetF1_2 on Top Layer "Top Layer-+12 1" (solid, pour order 30): 1045.34,1920.78 1045.04,1389.54 640.16,1389.54 538.73,1490.97 538.73,1819.93 607.02,1819.93 666.09,1879
RECTIFIER_OUT on Top Layer "Top Layer-RECTIFIER_OUT 1" (solid, pour order 86): 3207.82,807.47 3098.24,807.47 3026.09,735.32 3109.24,652.17 3207.82,652.17
RECTIFIER_IN on Top Layer "Top Layer-RECTIFIER_IN" (solid, pour order 82): 1169.26,1299.21 1364.08,1299.21 1364.08,799.91 1272.84,708.66 1208.63,708.66 1169.26,748.03
RECTIFIER_OUT on Top Layer "Top Layer-RECTIFIER_OUT" (solid, pour order 76): 1129.88,1164.76 1044.48,1164.76 1044.48,1017.43 1104.67,1017.43 1129.88,992.21 1129.88,856.69 939.88,856.68 866.14,930.42 866.14,1287.73 893.66,1315.26 1129.88,1315.26
no net on Top Layer "Top Layer-No Net 3" (solid, pour order 74): 1129.88,1164.76
LC_2_OUTPUT on Top Layer "Top Layer-LC_2_OUTPUT" (solid, pour order 70): 4893.33,2665.91 4734.47,2665.91 4734.47,2800.44 4734.47,2804.18 4893.33,2804.18
LC_3_OUTPUT on Top Layer "Top Layer-LC_3_OUTPUT" (solid, pour order 68): 4493.7,2665.91 4334.84,2665.91 4334.84,2800.44 4334.84,2804.18 4493.7,2804.18
LC_4_OUTPUT on Top Layer "Top Layer-LC_4_OUTPUT" (solid, pour order 66): 4132.22,2665.91 3973.36,2665.91 3973.36,2800.44 3973.36,2804.18 4132.22,2804.18
LC_1_OUTPUT on Top Layer "Top Layer-LC_1_OUTPUT" (solid, pour order 60): 3748.41,2665.91 3589.55,2665.91 3589.55,2800.44 3589.55,2804.18 3748.41,2804.18
LC_7_OUTPUT on Top Layer "Top Layer-LC_7_OUTPUT" (solid, pour order 50): 4296.77,602.66 4442.44,602.66 4442.44,445.27 4367.87,370.7 4296.77,370.7 4296.77,445.27
LC_5_OUTPUT on Top Layer "Top Layer-LC_5_OUTPUT" (solid, pour order 48): 3912.69,602.66 4059.69,602.66 4059.69,459.22 3971.17,370.7 3914.02,370.7 3914.02,407.99
LC_8_OUTPUT on Top Layer "Top Layer-LC_8_OUTPUT" (solid, pour order 46): 3534.04,612.5 3679.71,612.5 3679.71,455.11 3669.87,445.27 3534.87,445.27 3534.87,491.65
no net on Top Layer "Top Layer-No Net 1" (solid, pour order 36): 2855.27,2666.84
no net on Top Layer "Top Layer-No Net" (solid, pour order 0): 5551.72,1531.03
RECTIFIER_IN on Bottom Layer "Bottom Layer-RECTIFIER_IN" (solid, pour order 84): 421.22,3276.62 303.11,3276.62 303.11,3483.18 323.87,3503.94 421.22,3503.94
RECTIFIER_OUT on Bottom Layer "Bottom Layer-RECTIFIER_OUT" (solid, pour order 80): 421.22,3512.84 306.05,3512.84 306.05,3692.79 374.1,3760.84 421.22,3760.84
no net on Bottom Layer "Bottom Layer-No Net 3" (solid, pour order 62): 4133.12,2665.91
no net on Bottom Layer "Bottom Layer-No Net" (solid, pour order 16): 1840.44,1624.53
no net on Bottom Layer "Bottom Layer-No Net 1" (solid, pour order 14): 1856.93,1456.69 1877.92,1456.69 1838.55,1456.69
no net on Bottom Layer "Bottom Layer-No Net 2" (solid, pour order 6): 1870.62,2293.83

## Text inside footprints (layer, text, board x,y; h text height)
D9: Bottom Overlay "*" at 1847.17,4386.51 h60
D10: Bottom Overlay "*" at 1572.21,4660.84 h60 r90
LED1: Top Overlay "*" at 1409.67,1103.69 h60 r90
LED2: Top Overlay "*" at 1054.41,3837.72 h60 r90
X1: Top Overlay "SUPER SEAL 60POS" at 828.11,3835.44 h60 r270